# EAGLE board followLineMain (EAGLE 7.4.0)
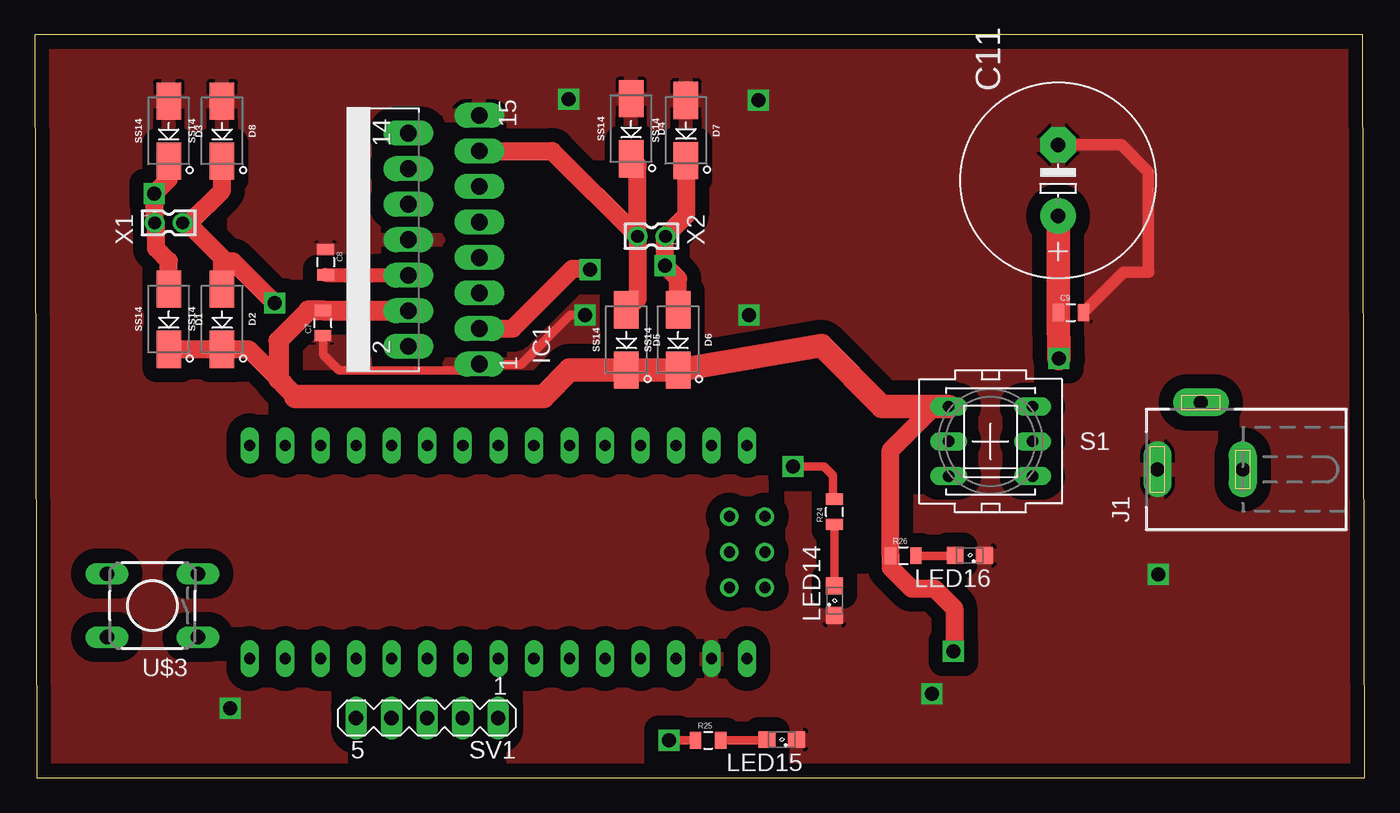
[diagram p0: board, top side]
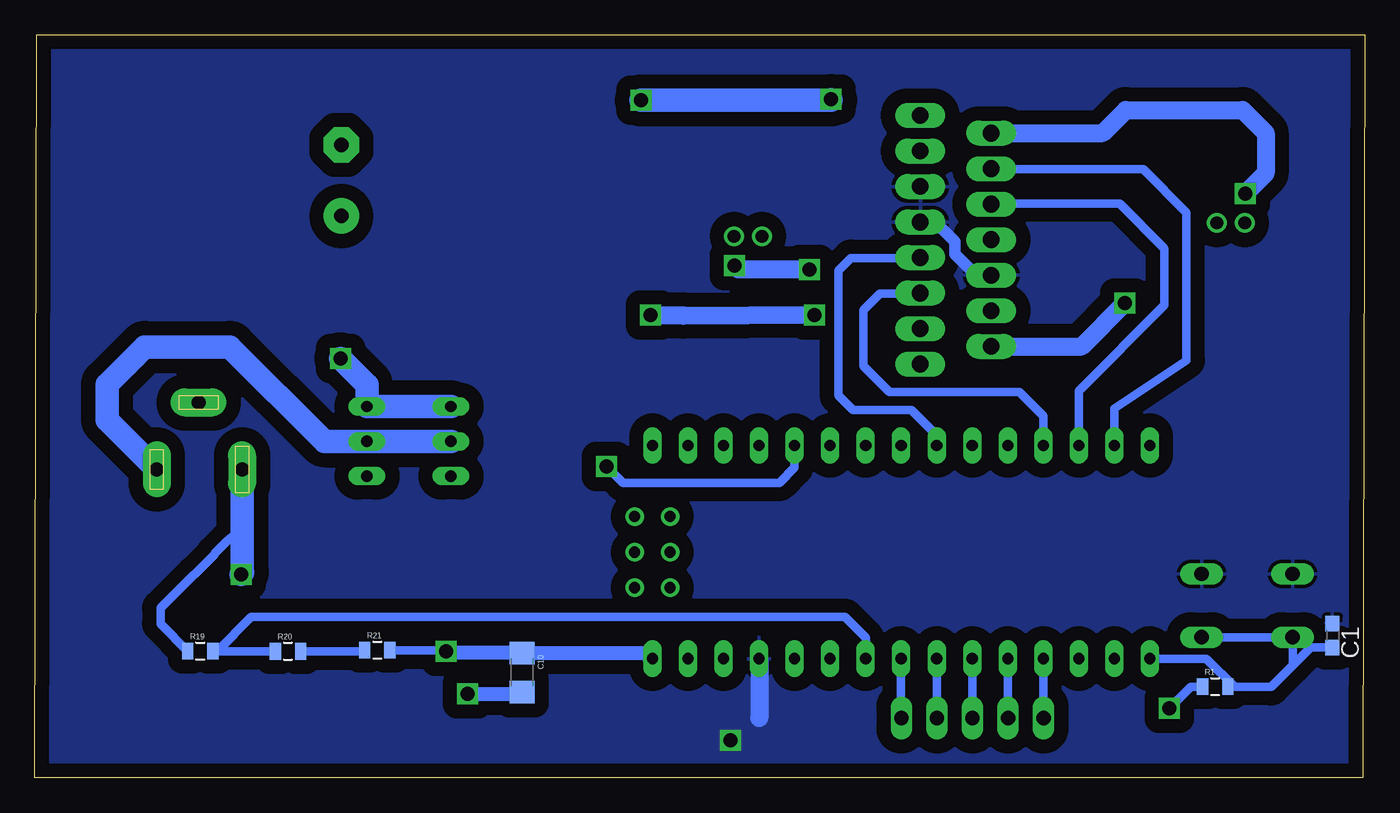
[diagram p1: board, bottom side, seen from below]

Size 95.03 x 53.11 mm. Coordinates in mm from the lower left corner, seen from the top.
Outline: 0.11,0 95.03,0 94.92,53.11 0,53.11 0.11,0
Copper layers (1*16): Top 0.035mm / dielectric 1.5mm / Bottom 0.035mm
Design rules "default": minimum track width 10mil, minimum drill 24mil, track to track 8mil, track to pad 8mil, pad to pad 8mil, via to via 8mil, smd to smd 8mil, copper to edge 40mil, drill to drill 8mil, minimum pad ring 10mil, minimum via ring 8mil, stop-mask expansion 4mil, vias tented up to drill 0mil, thermal gap 10mil

## Footprints (pad centres in the part's own frame; a part is rotated, then mirrored left to right if it is on the bottom)
C0603 = smd 1.1 x 1: 1 -0.85,0; 2 0.85,0
0805 = smd 0.8 x 1.2: 1 -0.9,0; 2 0.9,0
1206 = smd 1.6 x 1.8: 1 -1.4,0; 2 1.4,0
E5-13 = drill 1.016 pad 2.54: + -2.54,0 | drill 1.016 pad 2.54 octagon: - 2.54,0
DO214 = smd 2.65 x 1.75: ANODE -2.15,0; CATHODE 2.15,0
MULTIWATT-15 = drill 1.2 long: 1 -8.89,-7.62; 2 -7.62,-2.54; 3 -6.35,-7.62; 4 -5.08,-2.54; 5 -3.81,-7.62; 6 -2.54,-2.54; 7 -1.27,-7.62; 8 0,-2.54; 9 1.27,-7.62; 10 2.54,-2.54; 11 3.81,-7.62; 12 5.08,-2.54; 13 6.35,-7.62; 14 7.62,-2.54; 15 8.89,-7.62
DCJ0202 = drill 1 pad 2 long: 1 0,3.1; 2 4.8,0; 3 0,-3
SML0805 = smd 1.2 x 1.2: A 1.05,0; C -1.05,0
PVA2R = drill 0.813 long: 1 -2.997,2.489; 2 -2.997,0; 3 -2.997,-2.489; 4 2.997,2.489; 5 2.997,0; 6 2.997,-2.489
MA05-1 = drill 1.016 long: 1 -5.08,0; 2 -2.54,0; 3 0,0; 4 2.54,0; 5 5.08,0
NANO = drill 0.8 long: 3.3V -10.16,24.13; 5V -10.16,-1.27; A0 -10.16,19.05; A1 -10.16,16.51; A2 -10.16,13.97; A3 -10.16,11.43; A4 -10.16,8.89; A5 -10.16,6.35; A6 -10.16,3.81; A7 -10.16,1.27; AREF -10.16,21.59; D2 5.08,1.27; D3 5.08,3.81; D4 5.08,6.35; D5 5.08,8.89; D6 5.08,11.43; D7 5.08,13.97; D8 5.08,16.51; D9 5.08,19.05; D10 5.08,21.59; D11 5.08,24.13; D12 5.08,26.67; D13 -10.16,26.67; GND -10.16,-6.35; GND1 5.08,-1.27; RAW -10.16,-8.89; RST -10.16,-3.81; RST1 5.08,-3.81; RX1 5.08,-6.35; TX0 5.08,-8.89 | drill 0.8: ICSP1 -5.08,-10.16; ICSP2 -5.08,-7.62; ICSP3 -2.54,-10.16; ICSP4 -2.54,-7.62; ICSP5 0,-10.16; ICSP6 0,-7.62
TAC-SWITCH-PTH = drill 1.016 pad 1.524 long: 1 -3.251,2.261; 2 3.251,2.261; 3 -3.251,-2.261; 4 3.251,-2.261
332-02 = drill 0.9 pad 1.27: 1 0,-1; 2 0,1

## Placement (x,y rotation side)
C1  100nF  [C0603]  2.29,10.17 270 bottom
C7  100nF  [0805]  20.58,32.52 90 top
C8  100nF  [0805]  20.77,36.86 270 top
C9  100nF  [0805]  74.04,33.27 0 top
C10  1uF  [1206]  60.21,7.53 270 bottom
C11  330uF  [E5-13]  73.13,42.71 90 top
D1  SS14  [DO214]  9.56,32.79 270 top
D2  SS14  [DO214]  13.37,32.79 270 top
D3  SS14  [DO214]  9.56,46.24 270 top
D4  SS14  [DO214]  42.61,46.4 270 top
D5  SS14  [DO214]  42.27,31.31 270 top
D6  SS14  [DO214]  45.97,31.31 270 top
D7  SS14  [DO214]  46.53,46.28 270 top
D8  SS14  [DO214]  13.37,46.24 270 top
IC1  L298  [MULTIWATT-15]  24.14,38.47 90 top
J1  DCJ0202  [DCJ0202]  83.33,22.05 90 top
LED14  red  [SML0805]  57.15,12.67 90 top
LED15  green  [SML0805]  53.38,2.73 180 top
LED16  green  [SML0805]  66.82,15.9 180 top
R1  10K  [0805]  10.68,6.52 0 bottom
R19  100K  [0805]  83.21,9.06 0 bottom
R20  100K  [0805]  76.95,9.05 0 bottom
R21  100K  [0805]  70.56,9.13 0 bottom
R24  510  [0805]  57.15,19.02 90 top
R25  510  [0805]  48.12,2.68 0 top
R26  820  [0805]  62.06,15.88 0 top
S1  PVA2R  [PVA2R]  68.3,24.06 0 top
SV1  [MA05-1]  28.02,4.28 180 top
U$1  NANO  [NANO]  42.01,18.68 90 top
U$3  TACTILE-SWITCH-PTH  [TAC-SWITCH-PTH]  8.39,12.32 180 top
X1  332-02  [332-02]  9.56,39.68 270 top
X2  332-02  [332-02]  44.07,38.72 90 top

## Library data of the parts
C1 = eagle-ltspice; SPICEMODEL: NONE; SPICEPREFIX: C
C7-C10 = SparkFun-Capacitors
C11 = rcl
D1-D8 = ihpcb-diode
IC1 = st-microelectronics; MPN: L298N; OC_FARNELL: 1589425; OC_NEWARK: 32M1527
J1 = con-jack; OC_FARNELL: unknown; OC_NEWARK: unknown
LED14-LED16 = led
R1 R19-R21 R24-R26 = SparkFun-Passives
S1 = switch-misc
SV1 = con-lstb; OC_FARNELL: unknown; OC_NEWARK: unknown
U$1 = Arduino-clone
U$3 = GeekAmmo
X1 X2 = con-garry

## Nets
5V: C1.1 C8.2 IC1.6 IC1.9 IC1.11 R25.1 U$1.5V U$3.3 U$3.4
A5: R19.2 R20.1 U$1.A5
COUNT: C1.2 R1.2 U$1.D13 U$3.1 U$3.2
GND: C7.1 C8.1 C9.2 C10.2 C11.- D3.ANODE D4.ANODE D7.ANODE D8.ANODE IC1.1 IC1.8 IC1.15 J1.1 LED14.C LED15.C LED16.C R1.1 R19.1 U$1.GND
LOWBAT: R24.2 U$1.D2
N$1: LED16.A R26.2
N$2: LED14.A R24.1
N$3: SV1.1 U$1.A4
N$4: SV1.2 U$1.A3
N$5: R20.2 R21.1
N$6: SV1.3 U$1.A2
N$7: SV1.4 U$1.A1
N$8: SV1.5 U$1.A0
N$9: LED15.A R25.2
OUT1: D2.ANODE D8.CATHODE IC1.2 X1.2
OUT2: D6.ANODE D7.CATHODE IC1.3 X2.1
OUT3: D4.CATHODE D5.ANODE IC1.13 X2.2
OUT4: D1.ANODE D3.CATHODE IC1.14 X1.1
PWM1: IC1.5 U$1.D9
PWM2: IC1.7 U$1.D6
PWM3: IC1.10 U$1.D10
PWM4: IC1.12 U$1.D11
VBAT: C7.2 C9.1 C10.1 C11.+ D1.CATHODE D2.CATHODE D5.CATHODE D6.CATHODE IC1.4 R21.2 R26.1 S1.1 S1.4 U$1.RAW
VIN: J1.3 S1.2 S1.5

## Tracks (layer width: path | path; a pad name or v marks a point on that pad's centre or on a via)
5V  (via drill 1)
  Top 0.61: R25.1 v45.33,2.68 v45.32,2.69
  Top 1.016: C8.2 26.65,35.96 IC1.6
  Bottom 0.813: IC1.9 30.68,39.74 29.28,38.34 29.28,37.44 28.04,36.2 27.99,36.2 27.69,35.9 26.71,35.9 IC1.6
  Bottom 1.27: U$1.5V 43.25,8.52 43.25,4.28
  pour Bottom (isolate 1.016): 0.44,52.61 94.52,52.61 94.74,-0.15 0.66,-0.15
A5
  Bottom 0.61: R19.2 82.02,9.05 | R20.1 82.02,9.05 | 82.02,9.05 79.57,11.5 37.14,11.5 35.64,10 35.64,8.54 U$1.A5
COUNT
  Bottom 0.61: U$3.1 U$3.2 5.14,8.03 | 5.14,8.03 6.67,6.5 9.27,6.5 | 9.27,6.5 9.76,6.5 R1.2 | C1.2 3.85,9.32 5.14,8.03 | U$1.D13 11.29,8.52 9.27,6.5
GND  (via drill 1)
  Top 0.61: v39.33,33.08 38.24,33.08 34.75,29.54 31.8,29.54 IC1.1 31.3,29.12 21.74,29.12 20.58,30.28 C7.1
  Top 0.813: C11.- 77.64,45.25 79.58,43.31 79.58,36.22 79.63,36.17 77.84,36.17 C9.2
  Top 1.016: 46.54,49.33 D7.ANODE
  Bottom 0.61: R1.1 12.4,6.52 v13.96,4.96 | R19.1 86.06,11.01 86.06,12.14 83.64,14.56 83.62,14.56 82.19,15.99 82.19,16.04 81.27,16.96 81.24,16.96 80.8,17.4 80.33,17.4 80.23,17.5
  Bottom 1.016: v64.1,5.99 60.21,5.99 C10.2
  Bottom 1.27: v39.33,33.08 48.68,33.03 48.68,33.06 51.05,33.06 v51.05,33.1
  Bottom 1.676: J1.1 80.23,17.5 80.23,14.74 80.18,14.69 v80.31,14.56 | v51.72,48.44 38.12,48.44 38.12,48.47
  other vias: 38.12,48.52
  pour Top (isolate 1.016): 1.08,53.73 94.52,53.73 94.2,0.77 0.76,0.77
LOWBAT  (via drill 1)
  Top 0.61: v54.18,22.26 56.4,22.26 57.05,21.61 57.05,20.02 R24.2
  Bottom 0.61: U$1.D2 40.74,22.18 41.83,21.09 53.01,21.09 v54.18,22.26
N$1
  Top 0.61: R26.2 65.75,15.88 LED16.A
N$2
  Top 0.61: R24.1 LED14.A
N$3
  Bottom 0.61: SV1.1 33.12,4.28 U$1.A4
N$4
  Bottom 0.61: SV1.2 30.58,4.28 U$1.A3
N$5
  Bottom 0.61: 71.53,9.06 R21.1 71.54,9.05 R20.2
N$6
  Bottom 0.61: SV1.3 28.04,4.28 U$1.A2
N$7
  Bottom 0.61: SV1.4 25.5,4.28 U$1.A1
N$8
  Bottom 0.61: SV1.5 22.96,4.28 U$1.A0
N$9
  Top 0.61: R25.2 52.28,2.68 LED15.A
OUT1  (via drill 1)
  Top 1.016: 13.39,44.07 D8.CATHODE
  Top 1.27: X1.2 11.06,39.68 | 11.06,39.68 13.37,41.99 D8.CATHODE | 11.06,39.68 11.06,39.5 13.33,37.23 | 13.33,37.23 13.33,34.98 D2.ANODE | v17.13,33.94 v17.12,33.94 14.15,36.91 13.65,36.91 13.33,37.23
  Top 1.422: 13.34,44.06 D8.CATHODE
  Bottom 1.27: IC1.2 20.22,30.85 v17.13,33.94
OUT2  (via drill 1)
  Top 1.27: D7.CATHODE 46.53,40.18 X2.1 45.03,38.68 v45.03,36.62 45.97,35.68 D6.ANODE | IC1.3 34.14,32.12 38.41,36.39 39.65,36.39 v39.69,36.35
  Bottom 1.27: v39.69,36.35 44.76,36.35 v45.03,36.62
OUT3
  Top 1.27: X2.2 43.07,34.26 D5.ANODE | X2.2 43.07,43.79 D4.CATHODE | IC1.13 36.97,44.82 X2.2
OUT4  (via drill 1)
  Top 1.016: 8.59,39.65 X1.1
  Top 1.27: D1.ANODE 9.56,36.96 8.66,37.86 8.66,39.58 X1.1 8.52,39.72 v8.52,41.77 9.56,42.81 D3.CATHODE
  Bottom 1.27: IC1.14 18.71,46.09 17.06,47.74 8.71,47.74 7.07,46.1 7.07,43.22 v8.52,41.77
PWM1
  Bottom 0.61: U$1.D9 22.96,25.88 24.66,27.58 33.95,27.58 35.8,29.43 35.8,33.46 34.65,34.61 31.81,34.61 IC1.5
PWM2
  Bottom 0.61: U$1.D6 30.58,24.49 32.39,26.3 36.58,26.3 37.61,27.33 37.61,36.25 36.7,37.16 31.8,37.16 IC1.7
PWM3
  Bottom 0.61: U$1.D10 20.42,27.67 14.3,33.79 14.3,37.85 17.5,41.05 26.64,41.05 IC1.10
PWM4
  Bottom 0.61: U$1.D11 17.88,26.4 12.72,29.84 12.72,40.42 15.8,43.5 26.63,43.5 IC1.12
VBAT  (via drill 1)
  Top 1.016: 26.65,33.42 IC1.4
  Top 1.27: D1.CATHODE D2.CATHODE 15.27,30.64 17.4,28.51 17.74,28.17 | 64.3,26.55 61.16,23.41 R26.1 61.16,15.04 62.66,13.54 64.29,13.54 65.7,12.13 65.7,9.1 v65.65,9.05
  Top 1.422: 26.65,33.42 C7.2 19.56,33.42 17.4,31.26 17.4,28.51 | 17.74,28.17 18.63,27.28
  Top 1.676: v73.19,29.98 C9.1 73.14,36.24 C11.+ | S1.1 64.3,26.55 60.54,26.55 56.2,30.89 D6.CATHODE D5.CATHODE 38.22,29.16 36.34,27.28 18.63,27.28
  Bottom 0.61: R21.2 65.73,9.13 v65.65,9.05
  Bottom 1.016: v65.65,9.05 65.65,8.93 C10.1 51.31,8.93 U$1.RAW
  Bottom 1.27: 50.96,8.46 U$1.RAW
  Bottom 1.676: S1.1 S1.4 71.3,28.09 v73.19,29.98
VIN
  Bottom 1.676: S1.2 S1.5 74.34,24.05 81.1,30.81 87.18,30.81 89.87,28.12 89.87,25.6 J1.3